# Altium PCB PCB_esp32扩展板.pcbdoc
Units mil, origin at the board's own origin, x right, y up, seen from the top; angles counter-clockwise.
Board outline 2584.8 x 3569.1 mil, 2 copper layers (Top Layer, Bottom Layer); 49 components, 58 nets, 225 pads, 41 vias.
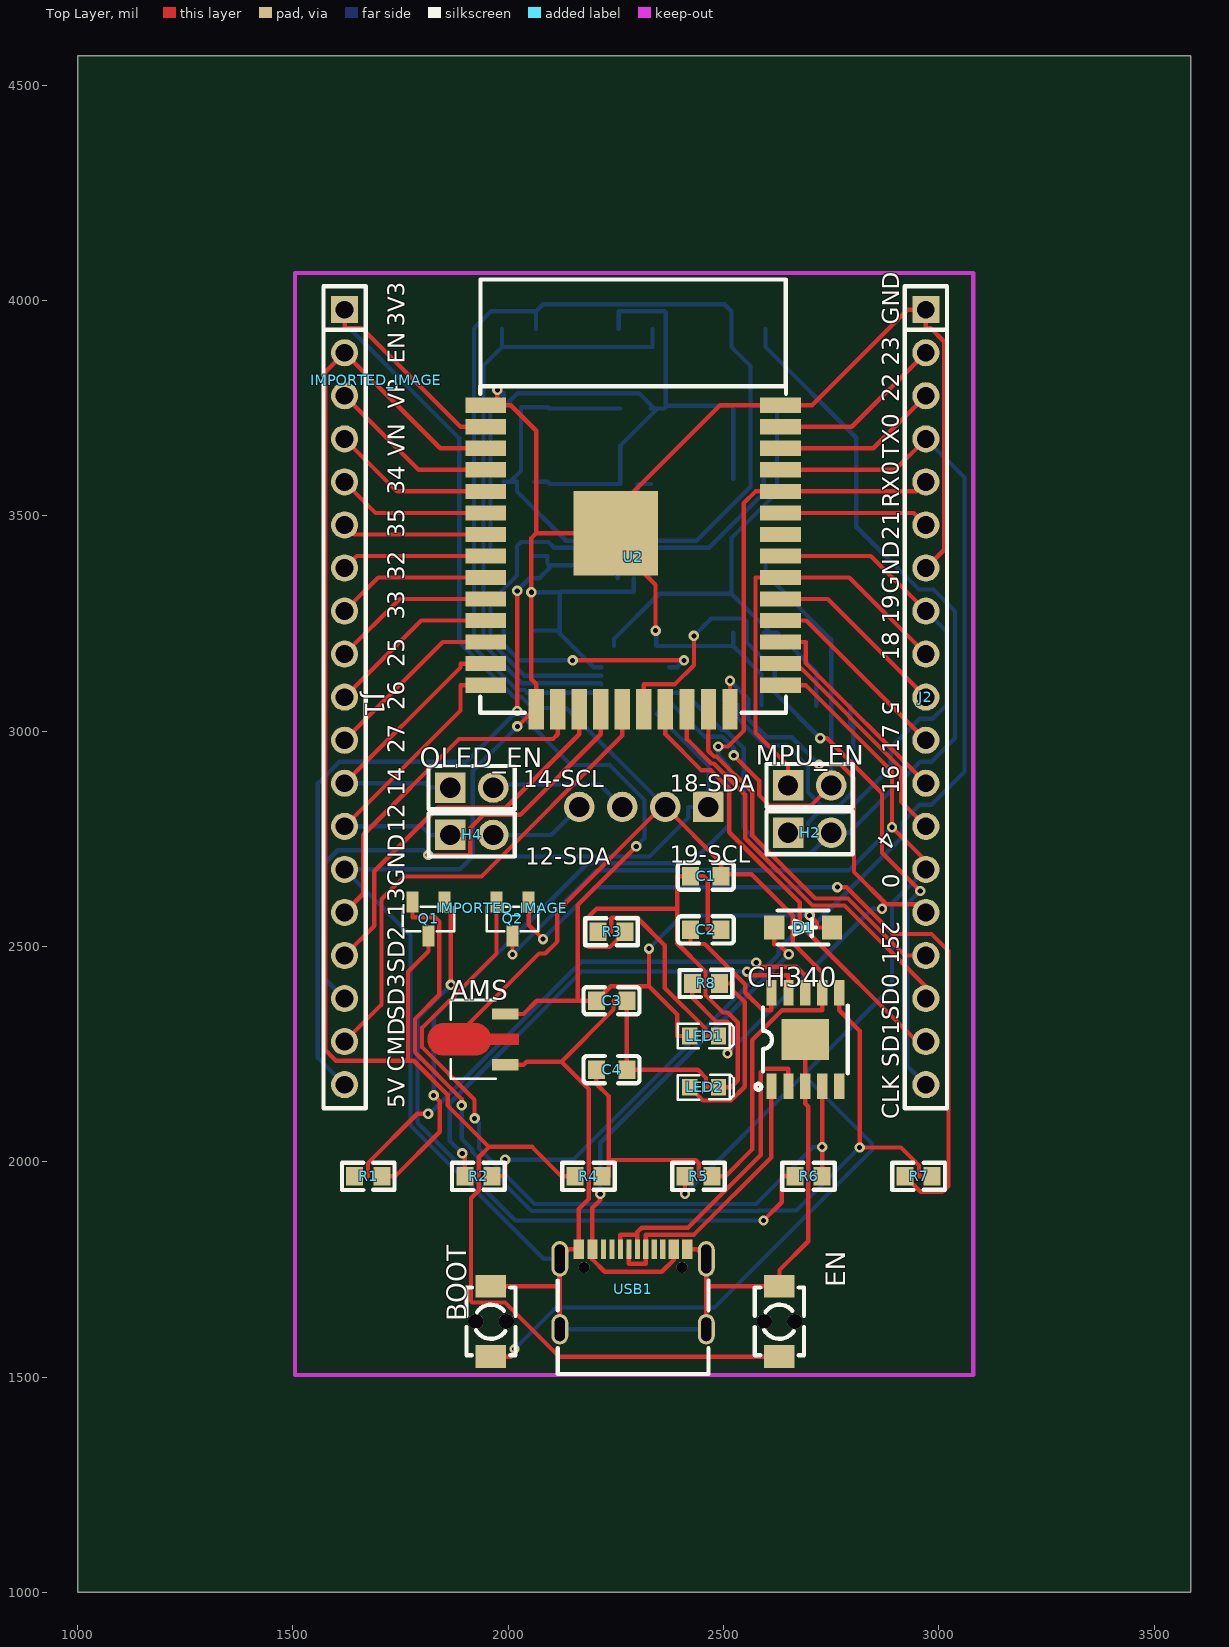
[diagram p0: Top Layer view]
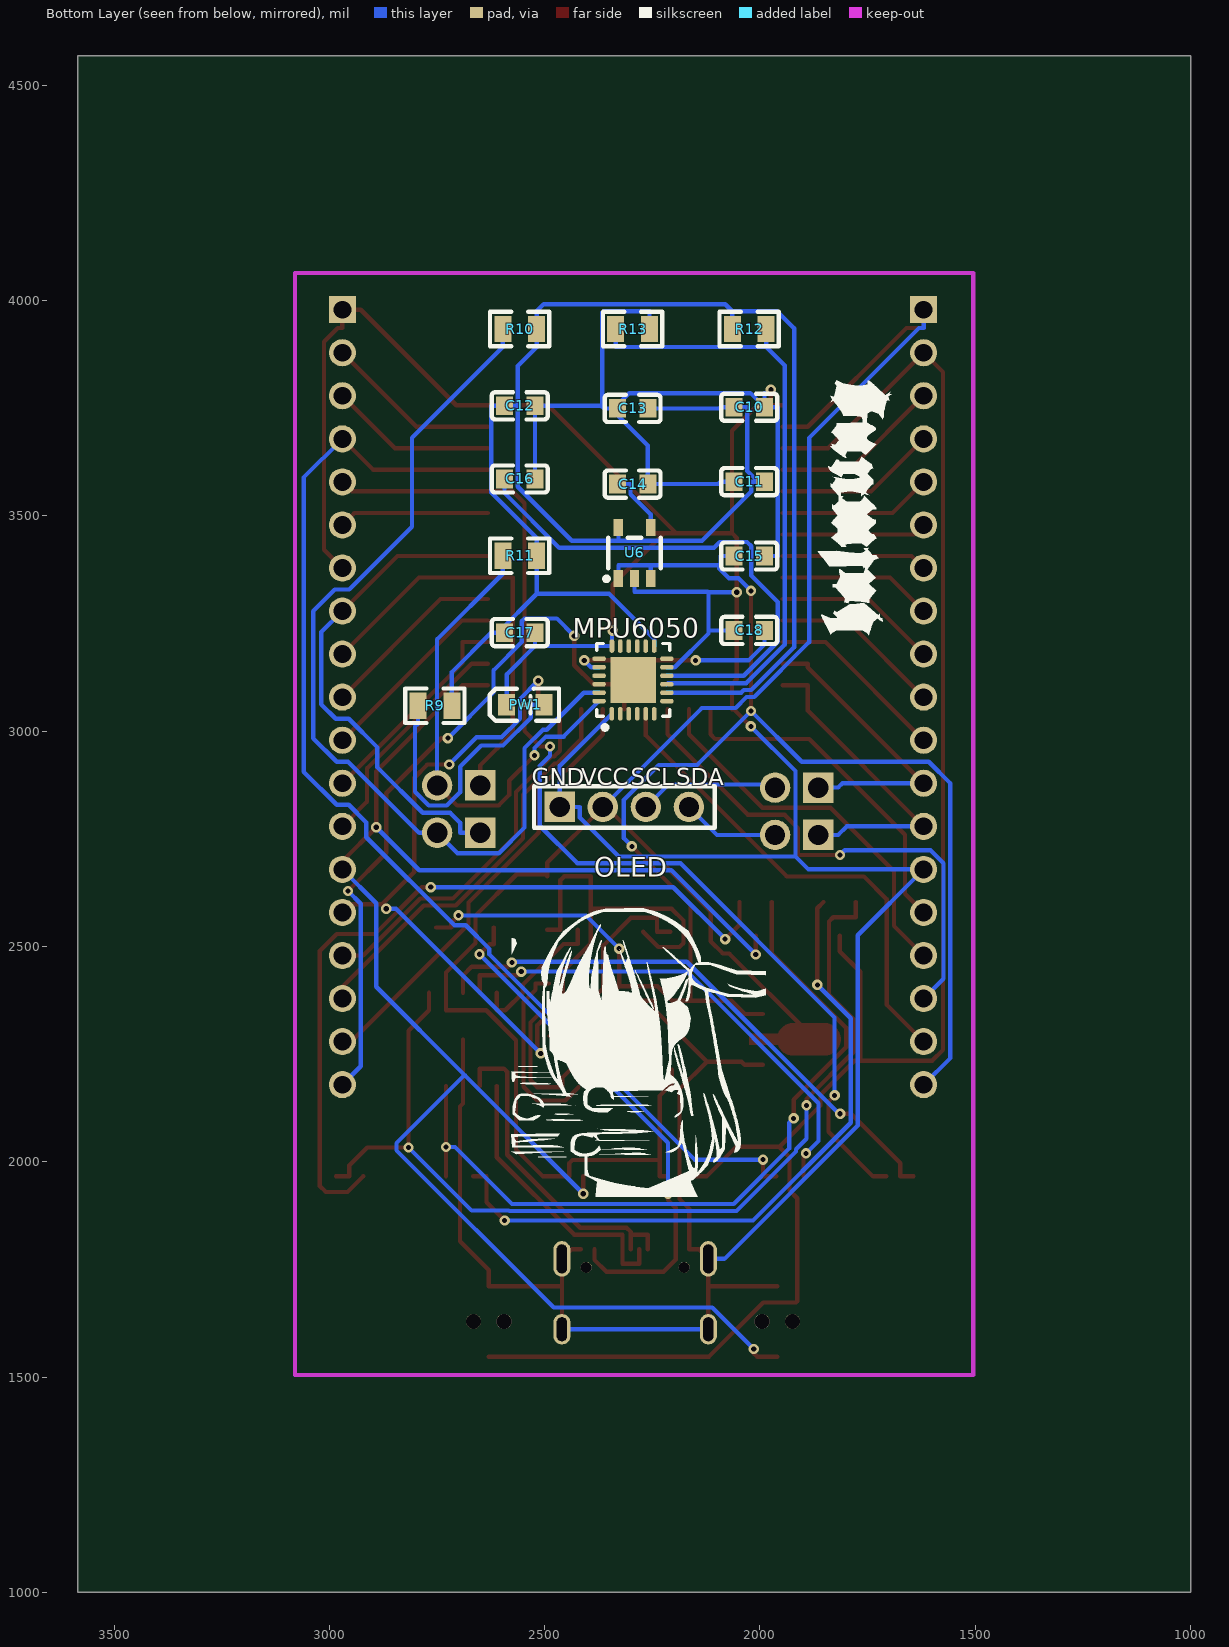
[diagram p1: Bottom Layer view, seen from below]

## Layer stack, top to bottom
Top Layer: signal copper (thickness not stored)
Dielectric: dielectric 12.6, FR-4, Dk 4.8
Bottom Layer: signal copper (thickness not stored)

## Board outline
3584.8,1000 1000,1000 1000,4569.1 3584.8,4569.1

## Components (designator, comment, footprint, x,y, rotation, side; value= is the part's Value field where it differs from the comment)
AMS "AMS1117-3.3_C347256" SOT-89_L4.5-W2.5-P1.50-LS4.2-BR 1940,2284.1 r0 top
BOOT "TSA343G00D-250J2" SW-SMD_L4.0-W2.9-P4.15-EH 1960,1629.1 r90 top
C1 "10u" C0603#1 2459.02,2663.13 r0 top
C2 "1u" C0603#1 2459.02,2538.62 r0 top
C3 "10u" C0603#1 2240.01,2374.1 r0 top
C4 "10u" C0603#1 2240.01,2214.1 r0 top
C10 "100nF" C0603#2 2025,3752.61 r0 bottom
C11 "1uF" C0603#2 2025,3579.77 r0 bottom
C12 "1uF" C0603#2 2558.03,3755.68 r0 bottom
C13 "100nF" C0603#2 2295.95,3749.77 r0 bottom
C14 "22nF" C0603#2 2295.95,3574.1 r0 bottom
C15 "1uF" C0603#2 2025,3406.93 r0 bottom
C16 "100nF" C0603#2 2558.03,3585.93 r0 bottom
C17 "100nF" C0603#2 2558.03,3229.1 r0 bottom
C18 "2.2nF" C0603#2 2025,3234.1 r0 bottom
CH340 "CH340K" ESOP-10_L4.9-W3.9-P1.00-LS6.2-BL-EP 2690,2284.1 r0 top
D1 "1N5819HW-7-F" SOD-123_L2.8-W1.8-LS3.7-FD 2685,2544.1 r0 top
EN "TSA343G00D-250J2" SW-SMD_L4.0-W2.9-P4.15-EH 2630,1629.1 r90 top
H2 "Header-Male-2.54_1x2" HDR-TH_2P-P2.54-V-M-1 2700,2764.1 r0 top
H4 "Header-Male-2.54_1x2" HDR-TH_2P-P2.54-V-M-1 1915,2759.1 r0 top
IMPORTED_IMAGE "IMPORTED_IMAGE" IMPORTED_IMAGE 1693.64,3814.86 r0 top
IMPORTED_IMAGE "IMPORTED_IMAGE" IMPORTED_IMAGE 1986.48,2588.57 r0 top
J1 "Header-Male-2.54_1x19" HDR-TH_19P-P2.54-V-M 1620,3079.1 r270 top
J2 "Header-Male-2.54_1x19" HDR-TH_19P-P2.54-V-M 2970,3079.1 r270 top
LED1 "LED-0603_R" LED0603_RED 2454.89,2292.14 r0 top
LED2 "LED-0603_R" LED0603_RED 2454.89,2173.13 r0 top
MPU6050 "MPU-6050_C24112" QFN-24_L4.0-W4.0-P0.50-BL-EP2.6 2295,3119.1 r0 bottom
MPU_EN "Header-Male-2.54_1x2" HDR-TH_2P-P2.54-V-M-1 2700,2874.1 r0 top
OLED "A2541HWV-4P" HDR-TH_4P-P2.54-V_A2541HWV-4P 2315,2824.1 r0 bottom
OLED_EN "Header-Male-2.54_1x2" HDR-TH_2P-P2.54-V-M-1 1915,2869.1 r0 top
PW1 "BL-HB335B-TRB-6" LED0805-RD 2545,3061.46 r0 bottom
Q1 "S8050" SOT-23-3_L2.9-W1.3-P1.90-LS2.4-BR 1815,2564.1 r90 top
Q2 "S8050" SOT-23-3_L2.9-W1.3-P1.90-LS2.4-BR 2010,2564.1 r90 top
R1 "220R" R0603 1675,1966.1 r0 top
R2 "220R" R0603 1930.65,1966.1 r0 top
R3 "1k" R0603 2240,2534.1 r0 top
R4 "10k" R0603 2186.31,1966.1 r0 top
R5 "10k" R0603 2441.96,1966.1 r0 top
R6 "10k" R0603 2697.61,1966.1 r0 top
R7 "10k" R0603 2953.27,1966.11 r0 top
R8 "1k" R0603 2459.04,2414.1 r0 top
R9 "470" R0805 2755,3059.1 r0 bottom
R10 "4.7K" R0805 2558.03,3934.1 r0 bottom
R11 "4.7K" R0805 2558.03,3407.51 r0 bottom
R12 "10K" R0805 2025,3934.1 r0 bottom
R13 "10K" R0805 2295.95,3934.1 r0 bottom
U2 "ESP32-WROOM-32" WIFIM-SMD_39P-L25.5-W18.0-P1.27 2290,3404.1 r0 top
U6 "RT9193-33GB" SOT-23-5_L3.0-W1.7-P0.95-LS2.8-BL 2291.46,3414.1 r0 bottom
USB1 "TYPE-C16PIN" USB-C-SMD_TYPE-C16PIN 2290,1704.1 r0 top

## Footprints (in the part's own frame and the unit in brackets; to place one, negate y for a bottom-side part, rotate by r counter-clockwise, add the part's x,y. Pads: shape width x height; smd on the part's side, far side on the other; paste and mask are expansions set on the pad)
C0603#1 [mm]
  rect 1x1.1 smd: 1(-0.9,0) 2(0.9,0)
  silkscreen extent -1.65,-0.8 1.65,0.8
C0603#2 [mm]
  rect 1x1.1 smd: 1(0.9,0) 2(-0.9,0)
  silkscreen extent -1.65,-0.8 1.65,0.8
ESOP-10_L4.9-W3.9-P1.00-LS6.2-BL-EP [mm]
  rect 0.6x1.5 smd: 1(-2,-2.75) 2(-1,-2.75) 3(0,-2.75) 4(1,-2.75) 5(2,-2.75) 6(2,2.75) 7(1,2.75) 8(0,2.75) 9(-1,2.75) 10(-2,2.75)
  rect 2.8x2.4 smd: 11(0,0)
  silkscreen extent -2.94,-2.96 2.5,2
HDR-TH_2P-P2.54-V-M-1 [mm]
  rect 1.8x1.8 hole 1.2: 1(-1.27,0)
  round 1.8 hole 1.2: 2(1.27,0)
  silkscreen extent -2.54,-1.27 2.54,1.27
HDR-TH_4P-P2.54-V_A2541HWV-4P [mm]
  rect 1.8x1.8 hole 1.2: 1(3.81,0)
  round 1.8 hole 1.2: 2(1.27,0) 3(-1.27,0) 4(-3.81,0)
  silkscreen extent -5.33,-1.22 5.33,1.22
HDR-TH_19P-P2.54-V-M [mm]
  rect 1.6x1.6 hole 1.05: 1(-22.86,0)
  round 1.6 hole 1.05: 2(-20.32,0) 3(-17.78,0) 4(-15.24,0) 5(-12.7,0) 6(-10.16,0) 7(-7.62,0) 8(-5.08,0) 9(-2.54,0) 10(0,0) 11(2.54,0) 12(5.08,0) 13(7.62,0) 14(10.16,0) 15(12.7,0) 16(15.24,0) 17(17.78,0) 18(20.32,0) 19(22.86,0)
  silkscreen extent -24.25,-1.25 24.25,1.25
IMPORTED_IMAGE [mil]
LED0603_RED [mm]
  rect 0.9x1 smd: 1(-0.85,0) 2(0.85,0)
  silkscreen extent -1.54,-0.73 1.75,0.73
LED0805-RD [mm]
  rect 1x1.25 smd: 1(1.1,0) 2(-1.1,0)
  silkscreen extent -1.98,-0.96 2.1,0.95
QFN-24_L4.0-W4.0-P0.50-BL-EP2.6 [mm]
  oval 0.28x0.8 smd: 1(1.25,2) 2(0.75,2) 3(0.25,2) 4(-0.25,2) 5(-0.75,2) 6(-1.25,2) 13(-1.25,-2) 14(-0.75,-2) 15(-0.25,-2) 16(0.25,-2) 17(0.75,-2) 18(1.242,-2)
  oval 0.8x0.28 smd: 7(-2,1.25) 8(-2,0.75) 9(-2,0.25) 10(-2,-0.25) 11(-2,-0.75) 12(-2,-1.25) 19(2,-1.25) 20(2,-0.75) 21(2,-0.25) 22(2,0.25) 23(2,0.75) 24(2,1.25)
  rect 2.7x2.7 smd: 25(-0.013,0)
  silkscreen extent -2.16,-2.15 2.14,3.05
R0603 [mm]
  rect 1x1.1 smd: 1(-0.8,0) 2(0.8,0)
  silkscreen extent -1.55,-0.8 1.55,0.81
R0805 [mm]
  rect 1x1.55 smd: 1(1,0) 2(-1,0)
  silkscreen extent -1.75,-1.02 1.75,1.02
SOD-123_L2.8-W1.8-LS3.7-FD [mm]
  rect 1.2x1.4 smd: 1(-1.7,0) 2(1.7,0)
  silkscreen extent -1.5,-1 1.5,1
SOT-23-3_L2.9-W1.3-P1.90-LS2.4-BR [mm]
  rect 1.25x0.7 smd: 1(1,-0.95) 2(1,0.95) 3(-1,0)
  silkscreen extent -0.73,-1.53 0.73,1.53
SOT-23-5_L3.0-W1.7-P0.95-LS2.8-BL [mm]
  rect 0.55x1 smd: 1(0.95,1.5) 2(0,1.5) 3(-0.95,1.5) 4(-0.95,-1.5) 5(0.95,-1.5)
  silkscreen extent -1.55,-0.9 1.78,1.65
SOT-89_L4.5-W2.5-P1.50-LS4.2-BR [mm]
  rect 1.575x0.672 smd: 1(1.356,-1.5) 3(1.356,1.5)
  round 0 smd: 2(-1.356,0.009)
  Top Layer region: -2.283,0.959 -0.429,0.959 -0.385,0.958 -0.34,0.955 -0.296,0.949 -0.252,0.942 -0.208,0.933 -0.165,0.921 -0.123,0.908 -0.081,0.893 -0.04,0.875 0,0.856 0.04,0.835 0.078,0.812 0.115,0.788 0.151,0.761 0.185,0.733 0.219,0.704 0.251,0.673 0.281,0.64 0.31,0.606 0.337,0.571 0.362,0.534 0.386,0.497 0.408,0.458 0.428,0.418 0.447,0.339 2.144,0.339 2.144,-0.321 0.447,-0.321 0.428,-0.401 0.408,-0.44 0.386,-0.479 0.362,-0.517 0.337,-0.553 0.31,-0.588 0.281,-0.622 0.251,-0.655 0.219,-0.686 0.185,-0.716 0.151,-0.744 0.115,-0.77 0.078,-0.795 0.04,-0.818 0,-0.839 -0.04,-0.858 -0.081,-0.875 -0.123,-0.89 -0.165,-0.904 -0.208,-0.915 -0.252,-0.925 -0.296,-0.932 -0.34,-0.937 -0.385,-0.94 -0.429,-0.941 -2.283,-0.941 -2.328,-0.94 -2.372,-0.937 -2.416,-0.932 -2.46,-0.925 -2.504,-0.915 -2.547,-0.904 -2.589,-0.89 -2.631,-0.875 -2.672,-0.858 -2.713,-0.839 -2.752,-0.818 -2.79,-0.795 -2.827,-0.77 -2.863,-0.744 -2.898,-0.716 -2.931,-0.686 -2.963,-0.655 -2.993,-0.622 -3.022,-0.588 -3.049,-0.553 -3.075,-0.517 -3.098,-0.479 -3.12,-0.44 -3.141,-0.401 -3.159,-0.36 -3.175,-0.318 -3.189,-0.276 -3.202,-0.233 -3.212,-0.19 -3.22,-0.146 -3.227,-0.102 -3.231,-0.058 -3.233,-0.013 -3.233,0.031 -3.231,0.076 -3.227,0.12 -3.22,0.164 -3.212,0.208 -3.202,0.251 -3.189,0.294 -3.175,0.336 -3.159,0.377 -3.141,0.418 -3.12,0.458 -3.098,0.497 -3.075,0.534 -3.049,0.571 -3.022,0.606 -2.993,0.64 -2.963,0.673 -2.931,0.704 -2.898,0.733 -2.863,0.761 -2.827,0.788 -2.79,0.812 -2.752,0.835 -2.713,0.856 -2.672,0.875 -2.631,0.893 -2.589,0.908 -2.547,0.921 -2.504,0.933 -2.46,0.942 -2.416,0.949 -2.372,0.955 -2.328,0.958
  silkscreen extent -1.87,-2.33 0.78,2.33
SW-SMD_L4.0-W2.9-P4.15-EH [mm]
  rect 1.35x1.8 smd: 1(-2.075,0) 2(2.075,0)
  round 0.9 hole 0.9 unplated: ""(0,0.9) ""(0,-0.9)
  silkscreen extent -2,-1.45 2,1.45
USB-C-SMD_TYPE-C16PIN [mm]
  oval 1x2.1 hole 0.6 slot 1.7 at 90 deg: 1(-4.32,1.787) 2(4.32,1.787)
  oval 1x1.8 hole 0.6 slot 1.4 at 90 deg: 3(-4.32,-2.362) 4(4.32,-2.362)
  rect 0.6x1.15 smd: A1B12(-3.2,2.363) A4B9(-2.4,2.363) B1A12(3.2,2.363) B4A9(2.4,2.363)
  rect 0.3x1.15 smd: A5(-1.25,2.363) A6(-0.25,2.363) A7(0.25,2.363) A8(-1.75,2.363) B5(1.75,2.363) B6(0.75,2.363) B7(-0.75,2.363) B8(1.25,2.363)
  round 0.65 hole 0.65 unplated: ""(-2.89,1.288) ""(2.89,1.288)
  silkscreen extent -4.45,-5 4.45,0.52
WIFIM-SMD_39P-L25.5-W18.0-P1.27 [mm]
  rect 2.4x0.9 smd: 1(-8.7,8.965) 2(-8.7,7.695) 3(-8.7,6.425) 4(-8.7,5.155) 5(-8.7,3.885) 6(-8.7,2.615) 7(-8.7,1.345) 8(-8.7,0.075) 9(-8.7,-1.195) 10(-8.7,-2.465) 11(-8.7,-3.735) 12(-8.7,-5.005) 13(-8.7,-6.275) 14(-8.7,-7.545) 25(8.7,-7.545) 26(8.7,-6.275) 27(8.7,-5.005) 28(8.7,-3.735) 29(8.7,-2.465) 30(8.7,-1.195) 31(8.7,0.075) 32(8.7,1.345) 33(8.7,2.615) 34(8.7,3.885) 35(8.7,5.155) 36(8.7,6.425) 37(8.7,7.695) 38(8.7,8.965)
  rect 0.9x2.4 smd: 15(-5.715,-8.965) 16(-4.445,-8.965) 17(-3.175,-8.965) 18(-1.905,-8.965) 19(-0.635,-8.965) 20(0.635,-8.965) 21(1.905,-8.965) 22(3.175,-8.965) 23(4.445,-8.965) 24(5.715,-8.965)
  rect 5x5 smd: 39(-1.017,1.422)
  silkscreen extent -9.02,-9.17 9.02,16.39

## Via types
v1: diameter 24.02, hole 12.01, Top Layer to Bottom Layer, 41 vias

## Nets (pads, with @x,y where several pads share a name; then routed paths per layer and width w, separated by ;. In a path a pad name is that pad's centre, name@x,y a point inside that pad or via, vN(x,y) a via of type N, cw(c..) or ccw(c..) an arc to the next point about the centre after c; other vN are vias at no path point)
3V3: AMS.2 C1.2 C4.1 CH340.7 J1.1 OLED.2 R4.2 R5.2 U2.2 | length 4525.6
  Top Layer w10: J1.1 1620,3936.53 1659.7,3936.53 1889.17,3707.06 U2.2 ; AMS.2 1886.61,2298.79 2071.74,2483.92 2086.21,2483.92 2114.2,2511.91 2114.2,2581.96 2356.34,2824.1 OLED.2 2494.46,2694.64 C1.2@2494.46,2667.95 ; C4.1 2204.58,2181.38 2233.19,2152.77 2233.19,2004 ; R4.2 2233.19,1966.1 2233.19,2004 ; C1.2 C1.2@2494.46,2667.95 ; 2233.19,2004 2435.56,2004 2442.7,1996.86 2442.7,1966.1 R5.2 2504.21,1966.1 2566.51,2028.4 2566.51,2282.33 2635.95,2351.77 2729.37,2351.77 CH340.7 2729.37,2412.66 2729.37,2432.96 2729.37,2439.46 2660.97,2507.86 2660.97,2571.94 2564.96,2667.95 C1.2@2494.46,2667.95
  Bottom Layer w10: J1.1 1620,3936.53 1630.65,3936.53 1885.96,3681.22 1885.96,3206.96 2013.45,3079.47 2031.14,3079.47 2056.52,3054.09 2135.01,3054.09 OLED.2
+5V: AMS.3 C3.1 C15.1 D1.2 J1.19 LED1.1 U6.1 U6.3 | length 3995.4
  Top Layer w10: AMS.3 2035.47,2343.16 2066.41,2374.1 2161.4,2374.1 ; v1(2020.9,3046.86) v1(2020.9,3326.08) ; v1(2297.53,2732.65) 2161.4,2596.52 2161.4,2374.1 ; v1(2327.17,2495.12) 2327.17,2407.54 ; LED1.1 2392.63,2292.14 2392.63,2342.08 2327.17,2407.54 ; v1(2700.14,2572.25) 2717.24,2555.15 2717.24,2544.1 D1.2 ; 2161.4,2374.1 C3.1 2238.02,2407.54 2327.17,2407.54
  Bottom Layer w10: J1.19 1557.86,2241.24 1557.86,2878.91 1608.05,2929.1 1903.14,2929.1 v1(2020.9,3046.86) 2146.08,2921.68 2235.06,2921.68 2316.64,2840.1 2316.64,2751.76 v1(2297.53,2732.65) ; v1(2020.9,3326.08) 2050.14,3355.32 2072.22,3355.32 2095.08,3378.18 2095.08,3385.81 ; C15.1 2091.19,3406.93 2091.19,3389.7 2095.08,3385.81 ; U6.3 2254.06,3381.79 2254.06,3385.81 ; v1(2327.17,2495.12) 2404.3,2572.25 v1(2700.14,2572.25) ; U6.1 2328.86,3385.81 2254.06,3385.81 ; 2095.08,3385.81 2254.06,3385.81
C2_1: C2.1 CH340.10 | length 335.9
  Top Layer w10: C2.1 2423.59,2505.89 2456.32,2505.89 2550.69,2411.52 2550.69,2392.62 2591.54,2351.77 2611.26,2351.77 CH340.10
C14_1: C14.1 U6.4 | length 151
  Bottom Layer w10: U6.4 2254.06,3503.92 2300.63,3550.49 2300.63,3574.1 C14.1
C16_1: C16.1 MPU6050.10 | length 1205.7
  Bottom Layer w10: MPU6050.10 2037.74,3128.94 1958.81,3207.87 1958.81,3300.15 2020.33,3361.67 2020.33,3429.92 2030.08,3439.67 2093.5,3439.67 2106.86,3426.31 2466.57,3426.31 2593.46,3553.2 C16.1
C18_2: C18.2 MPU6050.20 | length 507.7
  Top Layer w10: v1(2149.52,3164.59) v1(2408.24,3164.59)
  Bottom Layer w10: C18.2 1989.56,3201.38 2026.35,3164.59 v1(2149.52,3164.59) ; MPU6050.20 2392.28,3148.63 v1(2408.24,3164.59)
CH340_RXD: CH340.9 R2.1 | length 1141.8
  Top Layer w10: v1(1893.11,2019.46) 1899.16,2013.41 R2.1 ; v1(2554.51,2441.75) 2563.3,2432.96 2650.63,2432.96 CH340.9
  Bottom Layer w10: v1(1893.11,2019.46) 1864.08,2048.49 1864.08,2135.95 2169.88,2441.75 v1(2554.51,2441.75)
CH340_TXD: CH340.8 R1.1 | length 1324.9
  Top Layer w10: R1.1 1674.26,1966.1 1674.26,1996.85 1788.89,2111.48 v1(1813.93,2111.48) ; v1(2576.24,2463.03) 2586,2453.27 2669.69,2453.27 2690,2432.96 CH340.8
  Bottom Layer w10: v1(1813.93,2111.48) 1816.84,2111.48 2170.19,2464.83 2574.44,2464.83 v1(2576.24,2463.03)
CLK: J2.19 U2.20 | length 1684.7
  Top Layer w10: U2.20 2315,3109.47 2387.49,3109.47 2431.32,3153.3 v1(2431.32,3221.41) ; v1(2724.9,2983.93) 2740.27,2983.93 2868.24,2855.96 2868.24,2717.77 v1(2956.91,2629.1)
  Bottom Layer w10: v1(2431.32,3221.41) 2471.73,3261.82 2546.86,3261.82 2553.36,3255.32 2553.36,3207.12 2619.08,3141.4 2619.08,3089.75 v1(2724.9,2983.93) ; v1(2956.91,2629.1) 2927.31,2599.5 2927.31,2221.79 J2.19
CMD: J1.18 U2.19 | length 1144
  Top Layer w10: J1.18 1705.92,2365.02 1705.92,2609.65 1758.79,2662.52 1937.64,2662.52 2265,2989.88 U2.19
D+: CH340.1 USB1.A6 USB1.B6 | length 671.9
  Top Layer w10: USB1.A6 2280.16,1763.4 2319.53,1763.4 2319.53,1784.28 USB1.B6 2319.53,1830.82 2431.47,1830.82 2611.26,2010.61 CH340.1
D-: CH340.2 USB1.A7 USB1.B7 | length 774
  Top Layer w10: USB1.B7 2260.47,1830.82 2299.84,1830.82 ; USB1.A7 2299.84,1824.58 2299.84,1830.82 ; CH340.2 2650.63,2216.43 2594.86,2216.43 2586.9,2208.47 2586.9,2016.2 2417.62,1846.92 2309.96,1846.92 2299.84,1836.8 2299.84,1830.82
DTR: CH340.4 Q2.2 R6.2 | length 1814.3
  Top Layer w10: v1(1921.89,2100.85) 1921.89,2144.11 1799.49,2266.51 1799.49,2311 1972.6,2484.11 Q2.2 ; R6.2 2729.11,1998.83 v1(2729.11,2034.48) 2729.11,2134.98 2729.37,2135.24 CH340.4
  Bottom Layer w10: v1(1921.89,2100.85) 1932.28,2090.46 1932.28,2030.77 2061.08,1901.97 2575.83,1901.97 2708.34,2034.48 v1(2729.11,2034.48)
EN: EN.1 J1.2 Q1.3 R4.1 U2.3 | length 4229
  Top Layer w10: Q1.3 1815,2489.05 1767.31,2441.36 1767.31,2234.7 ; U2.3 1842.04,3657.06 J1.2 1575.04,3834.14 1575.04,2259.87 1600.21,2234.7 1767.31,2234.7 ; R4.1 2124.06,1966.1 2055.49,2034.67 1955.36,2034.67 ; EN.1 2118.3,1547.41 1992.57,1673.14 1916.42,1673.14 1913.49,1676.07 1913.49,1915.38 1931.39,1933.28 1931.39,2010.7 1955.36,2034.67 ; 1767.31,2234.7 1780.4,2234.7 1859.3,2155.8 1859.3,2130.73 1955.36,2034.67
GND: AMS.1 BOOT.2 C1.1 C2.2 C3.2 C4.2 C10.2 C11.1 C12.2 C13.1 C14.2 C15.2 C16.2 C17.2 C18.1 CH340.3 CH340.11 EN.2 J1.14 J2.1 J2.7 LED2.2 MPU6050.1 MPU6050.11 MPU6050.18 OLED.1 PW1.1 R3.2 R13.2 U2.1 U2.15 U2.38 U2.39 U6.2 USB1.1 USB1.2 USB1.3 USB1.4 USB1.A1B12 USB1.B1A12 | length 12737.8
  Top Layer w10: U2.1 U2.1@1976.65,3757.06 ; BOOT.2 2006.5,1710.79 2119.92,1710.79 ; v1(1974.82,3793.27) 1974.82,3758.89 U2.1@1976.65,3757.06 ; AMS.1 2035.47,2225.05 2042.74,2232.32 2123.45,2232.32 ; v1(2021.28,3011.31) 2062.81,3052.84 U2.15@2065,3052.84 ; U2.15 U2.15@2065,3052.84 ; USB1.3 2119.92,1710.79 ; U2.39 U2.39@2222.59,3460.09 ; R3.2 2236.18,2498.78 2186.84,2498.78 2177.74,2507.88 2177.74,2560.33 2205.19,2587.78 2392.83,2587.78 ; v1(2342.29,3233.6) 2342.29,3340.39 U2.39@2222.59,3460.09 ; USB1.B1A12 2437.44,1797.11 USB1.2 2460.08,1710.79 ; USB1.4 2460.08,1710.79 ; C2.2 2463.7,2538.62 2463.7,2653.77 2454.34,2663.13 2438.97,2663.13 C1.1 2392.83,2663.13 2392.83,2587.78 ; CH340.11 CH340.3 2690,2135.24 2696.89,2128.35 2696.89,1815.33 2630,1748.44 EN.2 2583.5,1710.79 2460.08,1710.79 ; J2.7 3012.57,3421.67 3012.57,3904.61 2980.65,3936.53 2970,3936.53 J2.1 2927.43,3979.1 2705.39,3757.06 U2.38 2492.19,3757.06 U2.39@2195.22,3460.09 ; U2.1@1976.65,3757.06 2005.8,3757.06 2065,3697.86 2065,3460.09 ; U2.15@2065,3052.84 2065,3080.3 2065,3109.46 2053.83,3120.63 v1(2053.83,3322.81) 2053.83,3448.92 2065,3460.09 ; 2065,3460.09 2140.47,3460.09 U2.39@2195.22,3460.09 ; 2119.92,1710.79 USB1.1 2142.56,1797.11 USB1.A1B12 2164.02,1890.55 2186.91,1913.44 2186.91,2168.86 2123.45,2232.32 ; 2123.45,2232.32 2244.7,2353.57 2244.7,2374.1 C3.2 C4.2 2440.18,2214.1 2459.56,2194.72 2459.56,2173.13 2488.35,2173.13 2517.13,2173.13 2533.22,2189.22 2533.22,2323.58 2510.05,2346.75 2498.67,2346.75 2458.32,2387.1 2458.32,2441.93 2392.83,2507.42 2392.83,2587.78 ; U2.39@2195.22,3460.09 U2.39@2222.59,3460.09
  Bottom Layer w10: v1(1974.82,3793.27) 1982.76,3785.33 1989.56,3785.33 C10.2 ; C15.2 1958.81,3406.93 1958.81,3752.61 C10.2 ; v1(2021.28,3011.31) 1917.55,2907.58 1917.55,2709.27 ; v1(2053.83,3322.81) 2119.82,3322.81 ; C18.1 2091.19,3234.1 2119.82,3234.1 ; C11.1 2091.19,3579.77 2096.86,3574.1 C14.2 2260.51,3663.52 C13.1@2346.76,3749.77 ; USB1.3 USB1.4 ; USB1.1 2082.7,1774.47 1773,2084.17 1773,2526.1 J1.14 1887.38,2679.1 1917.55,2709.27 ; MPU6050.11 2198.13,3148.63 2119.82,3226.94 2119.82,3234.1 ; R13.2 2256.58,3975.68 2363.16,3975.68 2366.08,3972.76 2366.08,3755.68 ; U6.2 2291.46,3324.3 2121.31,3324.3 2119.82,3322.81 ; C13.1 C13.1@2339.07,3749.77 ; v1(2342.29,3233.6) 2343.9,3231.99 MPU6050.18 2522.59,3197.84 ; MPU6050.1 2465,2919.57 OLED.1 2418.5,2824.1 2418.5,2799.7 2328.07,2709.27 1917.55,2709.27 ; C17.2 2522.59,3197.84 ; C16.2 C12.2 2491.84,3755.68 2366.08,3755.68 ; PW1.1 2588.31,3097.14 2588.31,3132.12 2522.59,3197.84 ; C10.2 2022.29,3785.34 2303.5,3785.34 C13.1@2339.07,3749.77 ; 2119.82,3234.1 2119.82,3322.81 ; C13.1@2339.07,3749.77 C13.1@2346.76,3749.77 ; C13.1@2346.76,3749.77 2362.14,3749.77 2366.08,3753.71 2366.08,3755.68
IO0: BOOT.1 J2.14 Q2.3 R5.1 U2.25 | length 4003
  Top Layer w10: BOOT.1 2006.5,1547.41 2014.47,1555.38 v1(2014.47,1565.35) ; v1(2010,2481.3) Q2.3 ; v1(2410.47,1925.94) 2410.47,1933.38 R5.1 ; U2.25 2690.83,3107.06 2891.32,2906.57 v1(2891.32,2777.17) 2970,2698.49 J2.14
  Bottom Layer w10: v1(2010,2481.3) 2205.78,2677.08 2791.23,2677.08 v1(2891.32,2777.17) ; v1(2014.47,1565.35) 2110.79,1661.67 2479.18,1661.67 2844.04,2026.53 2844.04,2043.39 2685.98,2201.45 ; v1(2410.47,1925.94) 2685.98,2201.45 ; J2.14 2891.22,2600.32 2891.22,2406.69 2685.98,2201.45
IO2: J2.15 R8.1 U2.24 | length 1629.1
  Top Layer w10: R8.1 2427.54,2381.37 2483.95,2324.96 2509.09,2324.96 2517.13,2316.92 2517.13,2259.59 v1(2509.36,2251.82) ; U2.24 2515,3109.47 v1(2515,3117.38) ; v1(2721.8,2922.69) 2772.51,2922.69 2803.03,2892.17 2803.03,2673.13 2878.21,2597.95 ; v1(2868.14,2587.88) 2878.21,2597.95 ; J2.15 2951.15,2597.95 2878.21,2597.95
  Bottom Layer w10: v1(2509.36,2251.82) 2845.42,2587.88 v1(2868.14,2587.88) ; v1(2515,3117.38) 2557.55,3074.83 2557.55,3028.67 2600.36,2985.86 2658.63,2985.86 v1(2721.8,2922.69)
IO4: J2.13 U2.26 | length 539.3
  Top Layer w10: U2.26 2669.27,3157.06 2912.58,2913.75 2912.58,2836.52 J2.13
IO5: J2.10 U2.29 | length 431.9
  Top Layer w10: U2.29 2742.04,3307.06 J2.10
IO12: H4.1 J1.13 U2.14 | length 751.1
  Top Layer w10: J1.13 1889.17,3048.27 1889.17,3107.06 U2.14
  Bottom Layer w10: J1.13 1798.5,2779.1 1818.5,2759.1 H4.1
IO13: J1.15 U2.16 | length 805
  Top Layer w10: J1.15 1663.24,2622.34 1663.24,2759.46 1885.81,2982.03 2104.2,2982.03 2115,2992.83 U2.16
IO14: J1.12 OLED_EN.1 U2.13 | length 696.9
  Top Layer w10: J1.12 1889.17,3148.27 1889.17,3157.06 U2.13
  Bottom Layer w10: J1.12 1808.5,2879.1 1818.5,2869.1 OLED_EN.1
IO15: J2.16 U2.23 | length 858
  Top Layer w10: U2.23 2465,2992.84 2464.6,2992.44 2464.6,2954.85 2478.12,2941.33 2484.13,2941.33 2566.64,2858.82 2566.64,2758.05 2713.27,2611.42 2789.2,2611.42 2921.52,2479.1 J2.16
IO16: J2.12 U2.27 | length 501.9
  Top Layer w10: U2.27 2690.83,3207.06 2690.83,3158.27 J2.12
IO17: J2.11 U2.28 | length 452.6
  Top Layer w10: U2.28 2692.04,3257.06 J2.11
IO18: J2.9 MPU_EN.1 U2.30 | length 983.9
  Top Layer w10: MPU_EN.1 2650,2920.6 2574.2,2996.4 2574.2,3357.06 U2.30 2792.04,3357.06 J2.9
IO19: H2.1 J2.8 U2.31 | length 1160.5
  Top Layer w10: U2.31 2842.04,3407.06 J2.8
  Bottom Layer w10: H2.1 2696.5,2764.1 2696.5,2787.36 2719.74,2810.6 2783.14,2810.6 2888.67,2916.13 2888.67,2962.42 2955.35,3029.1 2985.49,3029.1 3018.82,3062.43 3018.82,3230.28 J2.8
IO21: J2.6 U2.33 | length 349.1
  Top Layer w10: U2.33 2942.04,3507.06 J2.6
IO22: J2.3 U2.36 | length 388
  Top Layer w10: U2.36 2847.96,3657.06 J2.3
IO23: J2.2 U2.37 | length 408.7
  Top Layer w10: U2.37 2797.96,3707.06 J2.2
IO25: J1.9 U2.10 | length 380.5
  Top Layer w10: J1.9 1747.96,3307.06 U2.10
IO26: J1.10 U2.11 | length 401.2
  Top Layer w10: J1.10 1797.96,3257.06 U2.11
IO27: J1.11 U2.12 | length 421.9
  Top Layer w10: J1.11 1847.96,3207.06 U2.12
IO32: J1.7 U2.8 | length 339.1
  Top Layer w10: J1.7 1647.96,3407.06 U2.8
IO33: J1.8 U2.9 | length 359.8
  Top Layer w10: J1.8 1697.96,3357.06 U2.9
IO34: J1.5 U2.6 | length 357.3
  Top Layer w10: J1.5 1692.04,3507.06 U2.6
IO35: J1.6 U2.7 | length 336.6
  Top Layer w10: J1.6 1642.04,3457.06 U2.7
LED1_2: LED1.2 R3.1 | length 492.4
  Top Layer w10: R3.1 2239.26,2534.1 2239.26,2564.85 2241.24,2566.83 2299.54,2566.83 2363.77,2502.6 2363.77,2403.86 2459.56,2308.07 2459.56,2292.14 LED1.2@2488.35,2292.14
LED2_1: LED2.1 R8.2 | length 436
  Top Layer w10: LED2.1 2452.18,2142.37 2517.32,2142.37 2549.31,2174.36 2549.31,2371.24 2521.29,2399.26 2521.29,2414.1 R8.2
OLED_SCL: OLED.3 OLED_EN.2 | length 324.7
  Bottom Layer w10: OLED_EN.2 1972.28,2876.38 2212.72,2876.38 OLED.3
OLED_SDA: H4.2 OLED.4 | length 226.9
  Bottom Layer w10: H4.2 2100,2759.1 OLED.4
PW1_2: PW1.2 R9.1 | length 664.5
  Bottom Layer w10: PW1.2 2532.45,3061.46 2532.45,3031.01 2596.73,2966.73 2647.46,2966.73 2696.51,2917.68 2696.51,2858.51 2727.43,2827.59 2769.43,2827.59 2801.11,2859.27 2801.11,3010.78 2794.37,3017.52 R9.1
Q1_1: Q1.1 R6.1 | length 1599.4
  Top Layer w10: Q1.1 1866.82,2589.05 v1(1866.82,2410.98) ; v1(2593.05,1863.79) 2635.37,1906.11 2635.37,1966.1 R6.1
  Bottom Layer w10: v1(1866.82,2410.98) 1789.09,2333.25 1789.09,2090.84 2016.14,1863.79 v1(2593.05,1863.79)
Q2_1: Q2.1 R7.1 | length 1820.8
  Top Layer w10: Q2.1 2047.4,2567.79 2047.4,2550.72 v1(2080.91,2517.21) ; v1(2764.54,2637.86) 2785.52,2637.86 2894.28,2529.1 2983.23,2529.1 3022.62,2489.71 3022.62,1943.97 3008.36,1929.71 2958.17,1929.71 R7.1
  Bottom Layer w10: v1(2080.91,2517.21) 2201.56,2637.86 v1(2764.54,2637.86)
R12_2: MPU6050.9 R12.2 R13.1 | length 1453.6
  Bottom Layer w10: R12.2 1985.63,3892.52 ; MPU6050.9 2213.86,3111.66 2032.26,3111.66 1942.72,3201.2 1942.72,3849.61 1985.63,3892.52 ; R13.1 2335.32,3892.52 1985.63,3892.52
RTS: CH340.6 Q1.2 R7.2 | length 2322.5
  Top Layer w10: Q1.2 1777.6,2567.79 1830.01,2567.79 1839.86,2557.94 1839.86,2388.02 1783.4,2331.56 1783.4,2254.45 1891.81,2146.04 v1(1891.81,2130.98) ; CH340.6 2768.73,2372.07 2768.73,2351.77 2816.21,2304.29 v1(2816.21,2033.37) 2911.98,2033.37 2954.01,1991.34 2954.01,1966.1 R7.2
  Bottom Layer w10: v1(1891.81,2130.98) 1891.81,2053.41 1916.19,2029.03 1916.19,2024.1 2054.41,1885.88 2582.5,1885.88 2583.49,1886.87 2669.71,1886.87 v1(2816.21,2033.37)
SCL: H2.2 MPU6050.23 R10.1 | length 2189.9
  Bottom Layer w10: MPU6050.23 2409.17,3089.57 2495.16,3003.58 2503.92,3003.58 2546.78,2960.72 2546.78,2776.29 2606.44,2716.63 2702.53,2716.63 H2.2 2791.75,2764.1 2956.75,2929.1 2983.22,2929.1 3037.94,2983.82 3037.94,3278.74 2987.58,3329.1 2953.93,3329.1 2808.2,3474.83 2808.2,3681.72 2597.4,3892.52 R10.1
SD0: J2.18 U2.21 | length 1047.6
  Top Layer w10: U2.21 2365,2992.84 2448.69,2909.15 2470.79,2909.15 2513.56,2866.38 2513.56,2765.6 2677.06,2602.1 2677.06,2551.51 2949.47,2279.1 J2.18
SD1: J2.17 U2.22 | length 949
  Top Layer w10: U2.22 2415,2992.84 2415,2981.69 2471.45,2925.24 2477.45,2925.24 2550.55,2852.14 2550.55,2751.38 2706.6,2595.33 2781,2595.33 2970,2406.33 J2.17
SD2: J1.16 U2.17 | length 890.4
  Top Layer w10: J1.16 1688.81,2547.91 1688.81,2674.73 1836.22,2822.14 1994.31,2822.14 2165,2992.83 U2.17
SD3: J1.17 U2.18 | length 1200.5
  Top Layer w10: v1(1814.07,2712.59) 1908.58,2712.59 1911.51,2715.52 1911.51,2774.69 1942.86,2806.04 2028.21,2806.04 2215,2992.83 U2.18
  Bottom Layer w10: J1.17 1573.95,2425.15 1573.95,2693.49 1603.97,2723.51 1803.15,2723.51 v1(1814.07,2712.59)
SDA: MPU6050.24 MPU_EN.2 R11.1 | length 1121.8
  Top Layer w10: v1(2523.66,2943.97) 2582.74,2884.89 2582.74,2851.98 2607.13,2827.59 2703.49,2827.59 MPU_EN.2
  Bottom Layer w10: MPU6050.24 2456.14,2987.49 2497.25,2987.49 2523.66,2961.08 v1(2523.66,2943.97) ; R11.1 2597.4,3365.93 2750,3213.33 MPU_EN.2
SVN: J1.4 U2.5 | length 378
  Top Layer w10: J1.4 1742.04,3557.06 U2.5
SVP: J1.3 U2.4 | length 398.8
  Top Layer w10: J1.3 1792.04,3607.06 U2.4
U0_RXD: J2.5 R1.2 U2.34 | length 2558.5
  Top Layer w10: R1.2 1737.25,1966.1 1841.09,2069.94 1841.09,2139.88 v1(1826.76,2154.21) ; v1(2487.68,2964.41) 2510.27,2964.41 2546.75,3000.89 2546.75,3529.61 2574.2,3557.06 U2.34 2947.96,3557.06 J2.5
  Bottom Layer w10: v1(1826.76,2154.21) 1826.76,2335.35 2184.58,2693.17 2424.16,2693.17 2511.51,2780.52 2511.51,2919.34 2487.68,2943.17 v1(2487.68,2964.41)
U0_TXD: J2.4 R2.2 U2.35 | length 2715.1
  Top Layer w10: R2.2@1962.15,1966.1 1992.91,1966.1 v1(1992.91,2004.97) ; U2.35 2897.96,3607.06 J2.4
  Bottom Layer w10: v1(1992.91,2004.97) 2151.77,2004.97 2628.5,2481.7 2628.5,2494.16 2683.51,2549.17 2709.71,2549.17 2914.4,2753.86 2914.4,2788.18 2955.32,2829.1 2983.22,2829.1 3059.97,2905.85 3059.97,3589.13 J2.4
VBUS: D1.1 USB1.A4B9 USB1.B4A9 | length 1217.1
  Top Layer w10: v1(2213.6,1925.09) 2213.6,1911.26 2195.51,1893.17 USB1.A4B9 2195.51,1773.01 2224.13,1744.39 2356.73,1744.39 2384.49,1772.15 USB1.B4A9 ; D1.1 2618.07,2505.47 2628.12,2505.47 v1(2651.58,2482.01)
  Bottom Layer w10: v1(2213.6,1925.09) 2213.6,2044.03 v1(2651.58,2482.01)
VCC: C10.1 C11.2 C12.1 C13.2 C17.1 MPU6050.8 MPU6050.13 R9.2 R10.2 R11.2 R12.1 U6.5 | length 4559.2
  Bottom Layer w10: C11.2 C11.2@2004.94,3579.77 ; R12.1 2064.37,3975.68 ; MPU6050.8 2043.8,3089.57 2037.81,3095.56 2020.12,3095.56 1920.71,3194.97 1920.71,3936.05 1960.34,3975.68 2064.37,3975.68 ; MPU6050.13 2245.79,3214.18 2350.89,3319.28 2518.66,3319.28 ; C13.2 2094.03,3749.77 2091.19,3752.61 C10.1 2029.68,3752.61 2029.68,3604.51 C11.2@2004.94,3579.77 ; U6.5 2328.86,3446.44 ; C17.1 C17.1@2608.84,3229.1 ; R9.2 2715.63,3137.69 2624.22,3229.1 C17.1@2608.84,3229.1 ; C11.2@2004.94,3579.77 2020.32,3579.77 2020.32,3556.7 2134.61,3442.41 2324.83,3442.41 2328.86,3446.44 ; 2064.37,3975.68 2080.53,3991.84 2502.5,3991.84 2518.66,3975.68 2518.66,3954.89 R10.2 2518.66,3892.52 2562.71,3848.47 2562.71,3755.68 ; 2328.86,3446.44 2328.86,3442.41 2437.15,3442.41 2562.71,3567.97 2562.71,3755.68 ; 2518.66,3319.28 2518.66,3365.93 2518.66,3392.64 R11.2 2518.66,3449.1 2624.22,3554.66 2624.22,3755.68 C12.1 2562.71,3755.68 ; 2518.66,3319.28 C17.1@2608.84,3229.1
pads on no net: BOOT. CH340.5 EN. MPU6050.2 MPU6050.3 MPU6050.4 MPU6050.5 MPU6050.6 MPU6050.7 MPU6050.12 MPU6050.14 MPU6050.15 MPU6050.16 MPU6050.17 MPU6050.19 MPU6050.21 MPU6050.22 MPU6050.25 U2.32 USB1. USB1.A5 USB1.A8 USB1.B5 USB1.B8

## Silkscreen, mask and mechanical layers (free items; w line width, h text height)
Top Overlay:
  text "GND" at 2908.43,3944.1 h39.37 r90
  text "3V3" at 1759.68,3939.1 h39.37 r90
  text "EN" at 1759.68,3854.1 h39.37 r90
  text "23" at 2908.43,3849.1 h39.37 r90
  text "22" at 2908.43,3764.1 h39.37 r90
  text "VP" at 1759.68,3749.1 h39.37 r90
  text "VN" at 1759.68,3639.1 h39.37 r90
  text "TX0" at 2908.43,3634.1 h39.37 r90
  text "34" at 1759.68,3549.1 h39.37 r90
  text "RX0" at 2908.43,3519.1 h39.37 r90
  text "35" at 1759.68,3449.1 h39.37 r90
  text "21" at 2908.43,3444.1 h39.37 r90
  text "32" at 1759.68,3350.3 h39.37 r90
  text "GND" at 2908.43,3319.1 h39.37 r90
  text "33" at 1759.68,3259.1 h39.37 r90
  text "19" at 2908.43,3249.1 h39.37 r90
  text "18" at 2908.43,3164.1 h39.37 r90
  text "25" at 1759.68,3149.1 h39.37 r90
  text "5" at 2869.07,3069.1 h39.37 r270
  text "26" at 1759.68,3049.1 h39.37 r90
  text "27" at 1759.68,2949.1 h39.37 r90
  text "17" at 2908.43,2949.1 h39.37 r90
  text "14-SCL" at 2035,2869.41 h39.37
  text "18-SDA" at 2375,2859.41 h39.37
  text "16" at 2908.43,2854.1 h39.37 r90
  text "14" at 1759.68,2849.1 h39.37 r90
  text "4" at 2872.82,2770.67 h39.37 r234
  text "12" at 1759.68,2764.1 h39.37 r90
  text "19-SCL" at 2375,2694.41 h39.37
  text "12-SDA" at 2040,2689.41 h39.37
  text "0" at 2869.07,2669.1 h39.37 r270
  text "GND" at 1759.68,2639.1 h39.37 r90
  text "13" at 1759.68,2569.1 h39.37 r90
  text "2" at 2869.07,2559.1 h39.37 r270
  text "15" at 2908.43,2459.1 h39.37 r90
  text "SD2" at 1759.68,2439.1 h39.37 r90
  text "SD3" at 1759.68,2329.1 h39.37 r90
  text "SD0" at 2908.43,2329.1 h39.37 r90
  text "SD1" at 2908.43,2219.1 h39.37 r90
  text "CMD" at 1759.68,2209.1 h39.37 r90
  text "5V" at 1759.68,2124.1 h39.37 r90
  text "CLK" at 2908.43,2099.1 h39.37 r90
Bottom Overlay:
  text "SDA" at 2195,2875.09 h39.37
  text "SCL" at 2300,2875.09 h39.37
  text "VCC" at 2415,2875.09 h39.37
  text "GND" at 2530,2875.12 h39.37